# EAGLE board GF_Logo_PCB_v17 (EAGLE 9.7.0)
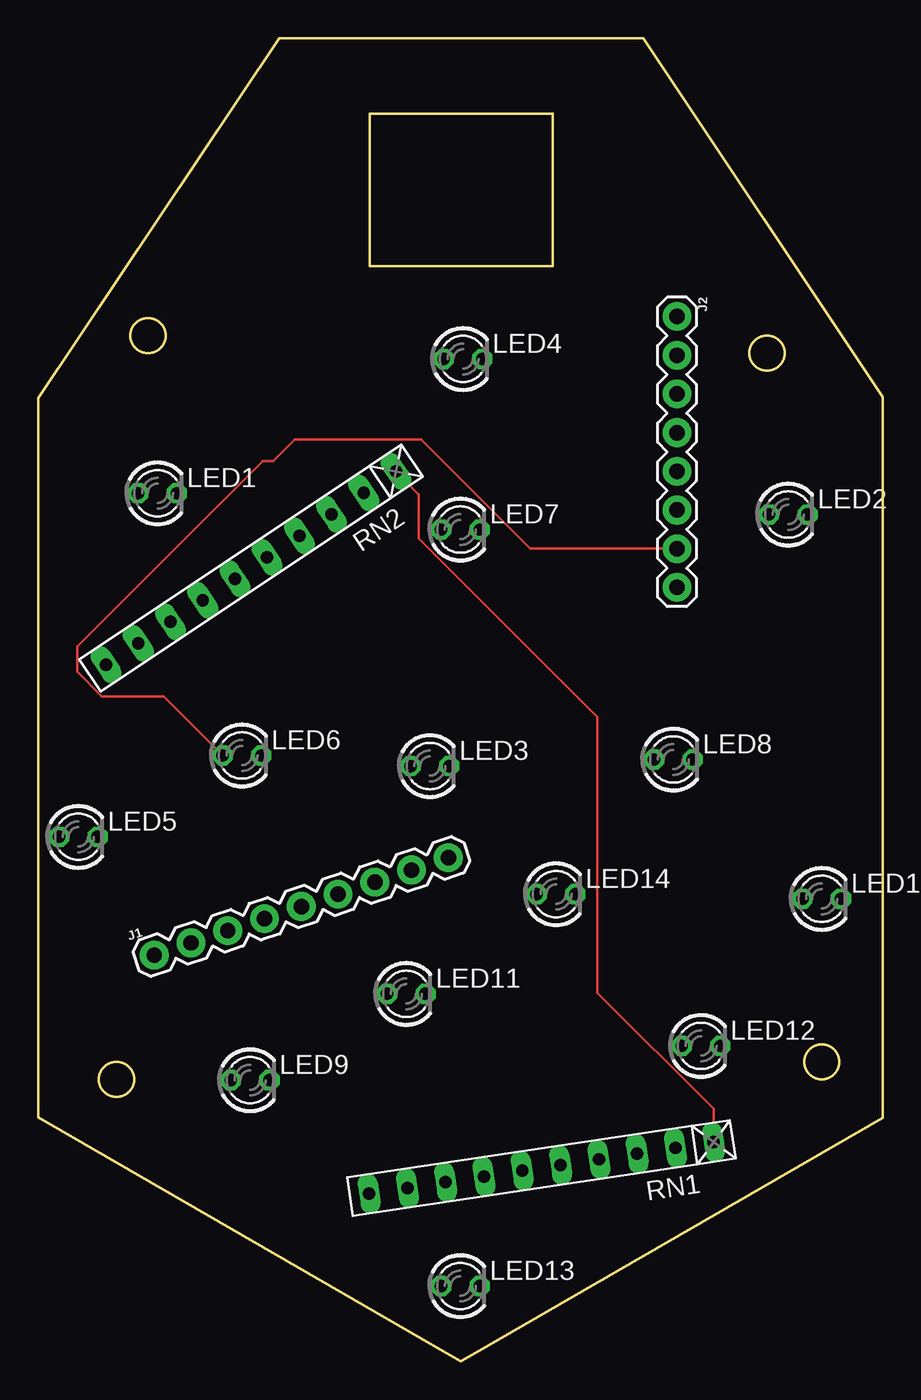
[diagram p0: board, top side]
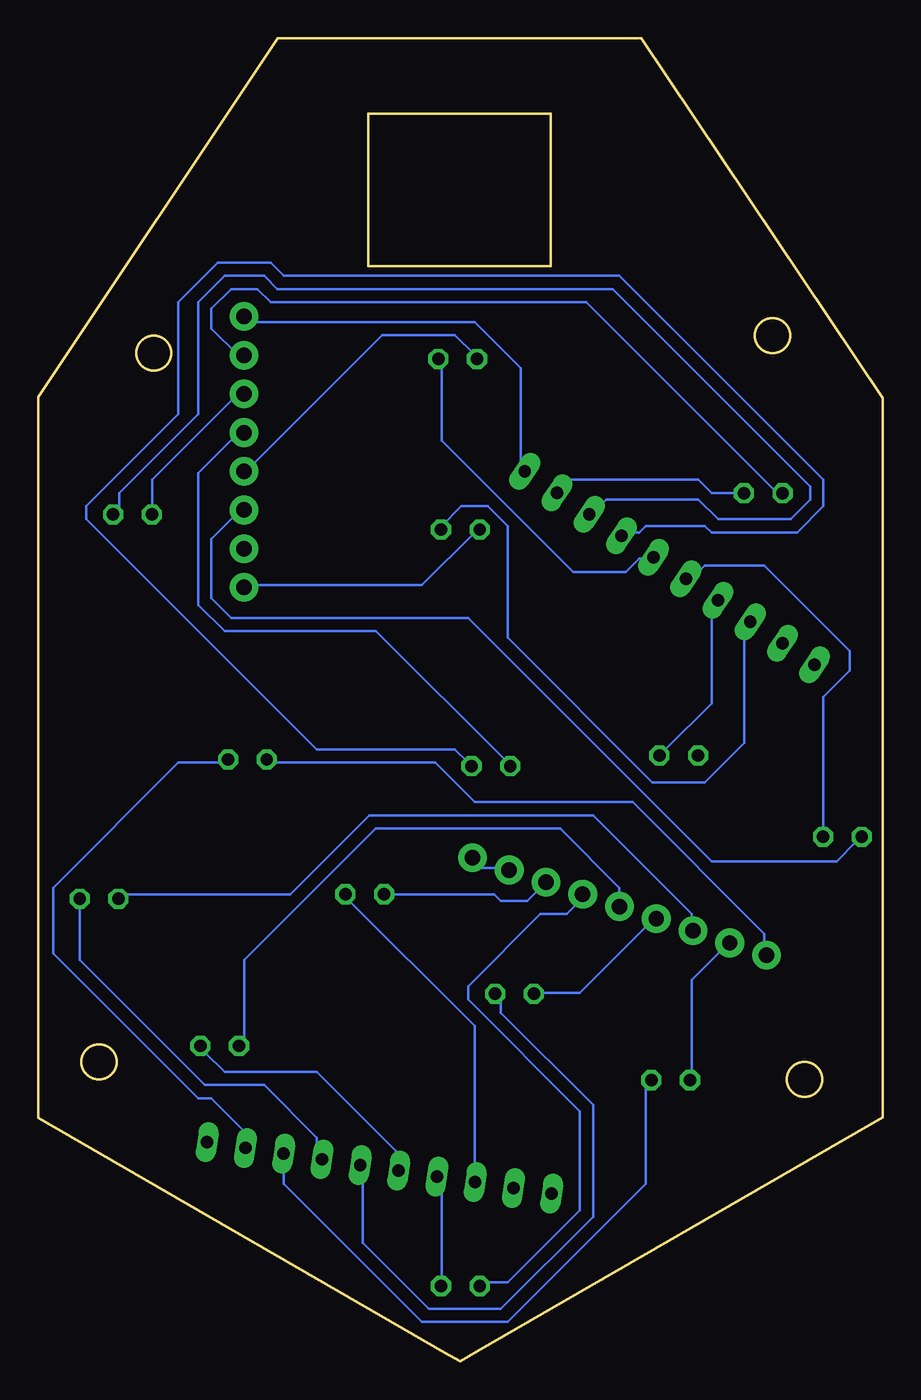
[diagram p1: board, bottom side, seen from below]

Size 55.41 x 86.85 mm. Coordinates in mm from the lower left corner, seen from the top.
Outline: 21.76,81.9 33.76,81.9 33.76,71.9 21.76,71.9 21.76,81.9
Outline: 0,63.21 0,16.01 26.59,0.66 27.72,0 28.73,0.58 55.41,15.98 55.41,63.28 39.7,86.85 15.83,86.85 0,63.21
Outline: circle at 7.22,67.33 radius 1.15
Outline: circle at 5.14,18.51 radius 1.15
Outline: circle at 51.41,19.66 radius 1.15
Outline: circle at 47.82,66.18 radius 1.15
Copper layers (1*16): Top 0.035mm / dielectric 1.5mm / Bottom 0.035mm
Design rules "default *": minimum track width 6mil, minimum drill 0.35mm, track to track 28mil, track to pad 28mil, pad to pad 12mil, via to via 12mil, smd to smd 10mil, copper to edge 12mil, drill to drill 6mil, minimum pad ring 10mil, minimum via ring 8mil, stop-mask expansion 4mil, vias tented up to drill 0mil, thermal gap 10mil

## Footprints (pad centres in the part's own frame; a part is rotated, then mirrored left to right if it is on the bottom)
1X09 = drill 1.016 pad 1.88: 1 0,0; 2 2.54,0; 3 5.08,0; 4 7.62,0; 5 10.16,0; 6 12.7,0; 7 15.24,0; 8 17.78,0; 9 20.32,0
1X08 = drill 1.016 pad 1.88: 1 0,0; 2 2.54,0; 3 5.08,0; 4 7.62,0; 5 10.16,0; 6 12.7,0; 7 15.24,0; 8 17.78,0
LED3MM = drill 0.813 octagon: A -1.27,0; K 1.27,0
RN-10 = drill 0.813 long: 1 -11.43,0; 2 -8.89,0; 3 -6.35,0; 4 -3.81,0; 5 -1.27,0; 6 1.27,0; 7 3.81,0; 8 6.35,0; 9 8.89,0; 10 11.43,0

## Placement (x,y rotation side)
J1  [1X09]  7.62,26.67 18.3 top
J2  [1X08]  41.91,68.58 270 top
LED1  Grn  [LED3MM]  7.83,56.98 0 top
LED2  Grn  [LED3MM]  49.22,55.59 0 top
LED3  Grn  [LED3MM]  25.71,39.08 0 top
LED4  Grn  [LED3MM]  27.88,65.79 0 top
LED5  Grn  [LED3MM]  2.64,34.43 0 top
LED6  Grn  [LED3MM]  13.38,39.77 0 top
LED7  Grn  [LED3MM]  27.71,54.6 0 top
LED8  Grn  [LED3MM]  41.68,39.51 0 top
LED9  Grn  [LED3MM]  13.91,18.46 0 top
LED10  Grn  [LED3MM]  51.41,30.36 0 top
LED11  Grn  [LED3MM]  24.16,24.13 0 top
LED12  Grn  [LED3MM]  43.5,20.71 0 top
LED13  Grn  [LED3MM]  27.71,4.95 0 top
LED14  Grn  [LED3MM]  33.98,30.67 0 top
RN1  330  [RN-10]  33.02,12.7 188.5 top
RN2  330  [RN-10]  13.97,52.07 213.7 top

## Library data of the parts
J1 = SparkFun-Connectors
J2 = SparkFun-Connectors; PROD_ID: CONN-08438
LED1-LED14 = led
RN1 RN2 = resistor-net; OC_FARNELL: unknown; OC_NEWARK: unknown

## Nets
+5V: J1.8 J1.9
GND: J2.1 RN1.1 RN2.1
N$1: LED1.K RN2.2
N$2: LED2.K RN2.3
N$3: LED3.K RN2.4
N$4: LED4.K RN2.5
N$5: LED5.K RN2.6
N$6: LED6.K RN2.7
N$7: LED7.K RN2.8
N$8: J2.2 LED1.A
N$9: J2.3 LED2.A
N$10: LED8.K RN1.2
N$11: LED9.K RN1.3
N$12: LED10.K RN1.4
N$13: LED11.K RN1.5
N$14: LED12.K RN1.6
N$15: LED13.K RN1.7
N$16: J2.4 LED3.A
N$17: J2.5 LED4.A
N$18: J2.6 LED5.A
N$19: J2.7 LED6.A
N$20: J2.8 LED7.A
N$21: LED14.K RN1.8
N$22: J1.1 LED8.A
N$23: J1.2 LED9.A
N$24: J1.3 LED10.A
N$25: J1.4 LED11.A
N$26: J1.5 LED12.A
N$27: J1.6 LED13.A
N$28: J1.7 LED14.A

## Tracks (layer width: path | path; a pad name or v marks a point on that pad's centre or on a via)
+5V
  Bottom 0.152: J1.8 24.61,32.38 26.34,32.38 26.77,32.82 J1.9
GND
  Top 0.152: RN2.1 24.99,56.9 24.99,54 36.7,42.29 36.7,24.19 44.32,16.57 RN1.1
  Bottom 0.152: RN2.1 23.75,58.73 23.75,65.2 26.77,68.22 41.88,68.22 J2.1
N$1
  Bottom 0.152: LED1.K 9.5,57 11.23,57 12.09,57.86 20.73,57.86 21.16,57.43 RN2.2
N$2
  Bottom 0.152: LED2.K 50.09,55.7 50.09,57 44.91,62.18 44.91,69.52 43.18,71.25 40.59,71.25 39.73,70.38 17.7,70.38 4.75,57.43 4.75,56.57 6.04,55.27 10.79,55.27 12.09,56.57 18.14,56.57 19,55.7 RN2.3
N$3
  Bottom 0.152: RN2.4 16.84,54.41 15.98,54.41 15.54,54.84 11.66,54.84 11.23,54.41 5.61,54.41 3.89,56.13 3.89,57.86 17.27,71.25 39.29,71.25 40.16,72.11 43.61,72.11 46.2,69.52 46.2,62.18 52.25,56.13 52.25,55.27 37.13,40.16 28.07,40.16 27.2,39.29 LED3.K
N$4
  Bottom 0.152: RN2.5 15.11,52.68 15.98,52.68 16.84,51.82 20.3,51.82 28.93,60.45 28.93,65.63 LED4.K
N$5
  Bottom 0.152: LED5.K 3.89,34.54 3.89,43.61 2.16,45.34 2.16,46.63 7.77,52.25 11.66,52.25 12.52,51.38 RN2.6
N$6
  Bottom 0.152: RN2.7 11.23,49.66 11.23,43.18 14.25,40.16 LED6.K
N$7
  Bottom 0.152: RN2.8 9.07,48.36 9.07,40.59 11.66,38 15.11,38 24.61,47.5 24.61,54.84 25.91,56.13 27.64,56.13 28.93,54.84 LED7.K
N$8
  Bottom 0.152: LED1.A 6.91,57 19.43,69.52 40.16,69.52 41.02,70.38 42.75,70.38 44.04,69.09 44.04,67.79 42.32,66.06 J2.2
N$9
  Bottom 0.152: LED2.A 47.93,55.7 47.93,57.86 42.32,63.48 J2.3
N$10
  Bottom 0.152: RN1.2 41.88,14.25 41.88,15.11 44.04,17.27 44.91,17.27 54.41,26.77 54.41,31.09 46.2,39.29 43.18,39.29 LED8.K
N$11
  Bottom 0.152: LED9.K 15.54,18.14 15.54,11.66 24.61,2.59 30.23,2.59 39.29,11.66 39.29,13.39 RN1.3
N$12
  Bottom 0.152: RN1.4 37.13,13.39 37.13,14.68 40.59,18.14 44.48,18.14 52.68,26.34 52.68,30.23 LED10.K
N$13
  Bottom 0.152: LED11.K 25.04,23.75 25.04,22.89 19,16.84 19,9.5 25.04,3.45 29.79,3.45 34.11,7.77 34.11,12.52 RN1.5
N$14
  Bottom 0.152: RN1.6 31.95,12.52 31.95,13.82 37.13,19 43.18,19 44.48,20.3 LED12.K
N$15
  Bottom 0.152: LED13.K 28.93,5.18 28.93,12.09 RN1.7
N$16
  Bottom 0.152: LED3.A 24.61,39.29 33.25,47.93 43.18,47.93 44.91,49.66 44.91,58.29 42.32,60.88 J2.4
N$17
  Bottom 0.152: LED4.A 26.77,66.06 28.07,67.36 32.82,67.36 41.88,58.29 J2.5
N$18
  Bottom 0.152: LED5.A 1.73,34.11 3.02,32.82 11.23,32.82 27.2,48.79 42.75,48.79 44.04,50.09 44.04,53.98 42.32,55.7 J2.6
N$19
  Top 0.152: J2.7 32.28,53.34 25.13,60.5 16.84,60.5 15.44,59.09 14.73,59.09 2.56,46.91 2.56,45.27 4.19,43.64 8.24,43.64 LED6.A
N$20
  Bottom 0.152: LED7.A 26.77,54.41 30.23,50.95 41.88,50.95 J2.8
N$21
  Bottom 0.152: RN1.8 26.77,12.09 26.77,22.02 35.41,30.66 LED14.K
N$22
  Bottom 0.152: LED8.A 40.16,39.29 29.36,39.29 26.77,36.7 16.41,36.7 7.77,28.07 7.77,26.77 J1.1
N$23
  Bottom 0.152: LED9.A 12.52,18.57 12.52,25.04 10.36,27.2 J1.2
N$24
  Bottom 0.152: LED10.A 50.09,30.66 38.86,30.66 33.68,35.84 19,35.84 12.52,29.36 12.52,28.5 J1.3
N$25
  Bottom 0.152: LED11.A 22.89,24.18 19.86,24.18 15.11,28.93 J1.4
N$26
  Bottom 0.152: LED12.A 41.88,20.73 41.88,26.34 33.25,34.98 21.16,34.98 17.27,31.09 17.27,30.23 J1.5
N$27
  Bottom 0.152: LED13.A 26.34,5.18 24.61,5.18 19.86,9.93 19.86,16.41 27.2,23.75 27.2,24.61 22.45,29.36 20.73,29.36 19.86,30.23 J1.6
N$28
  Bottom 0.152: LED14.A 32.38,30.66 25.48,30.66 25.04,30.23 23.32,30.23 22.45,31.09 J1.7